# Allegro board WEEK 11 ECG PROJECT.brd
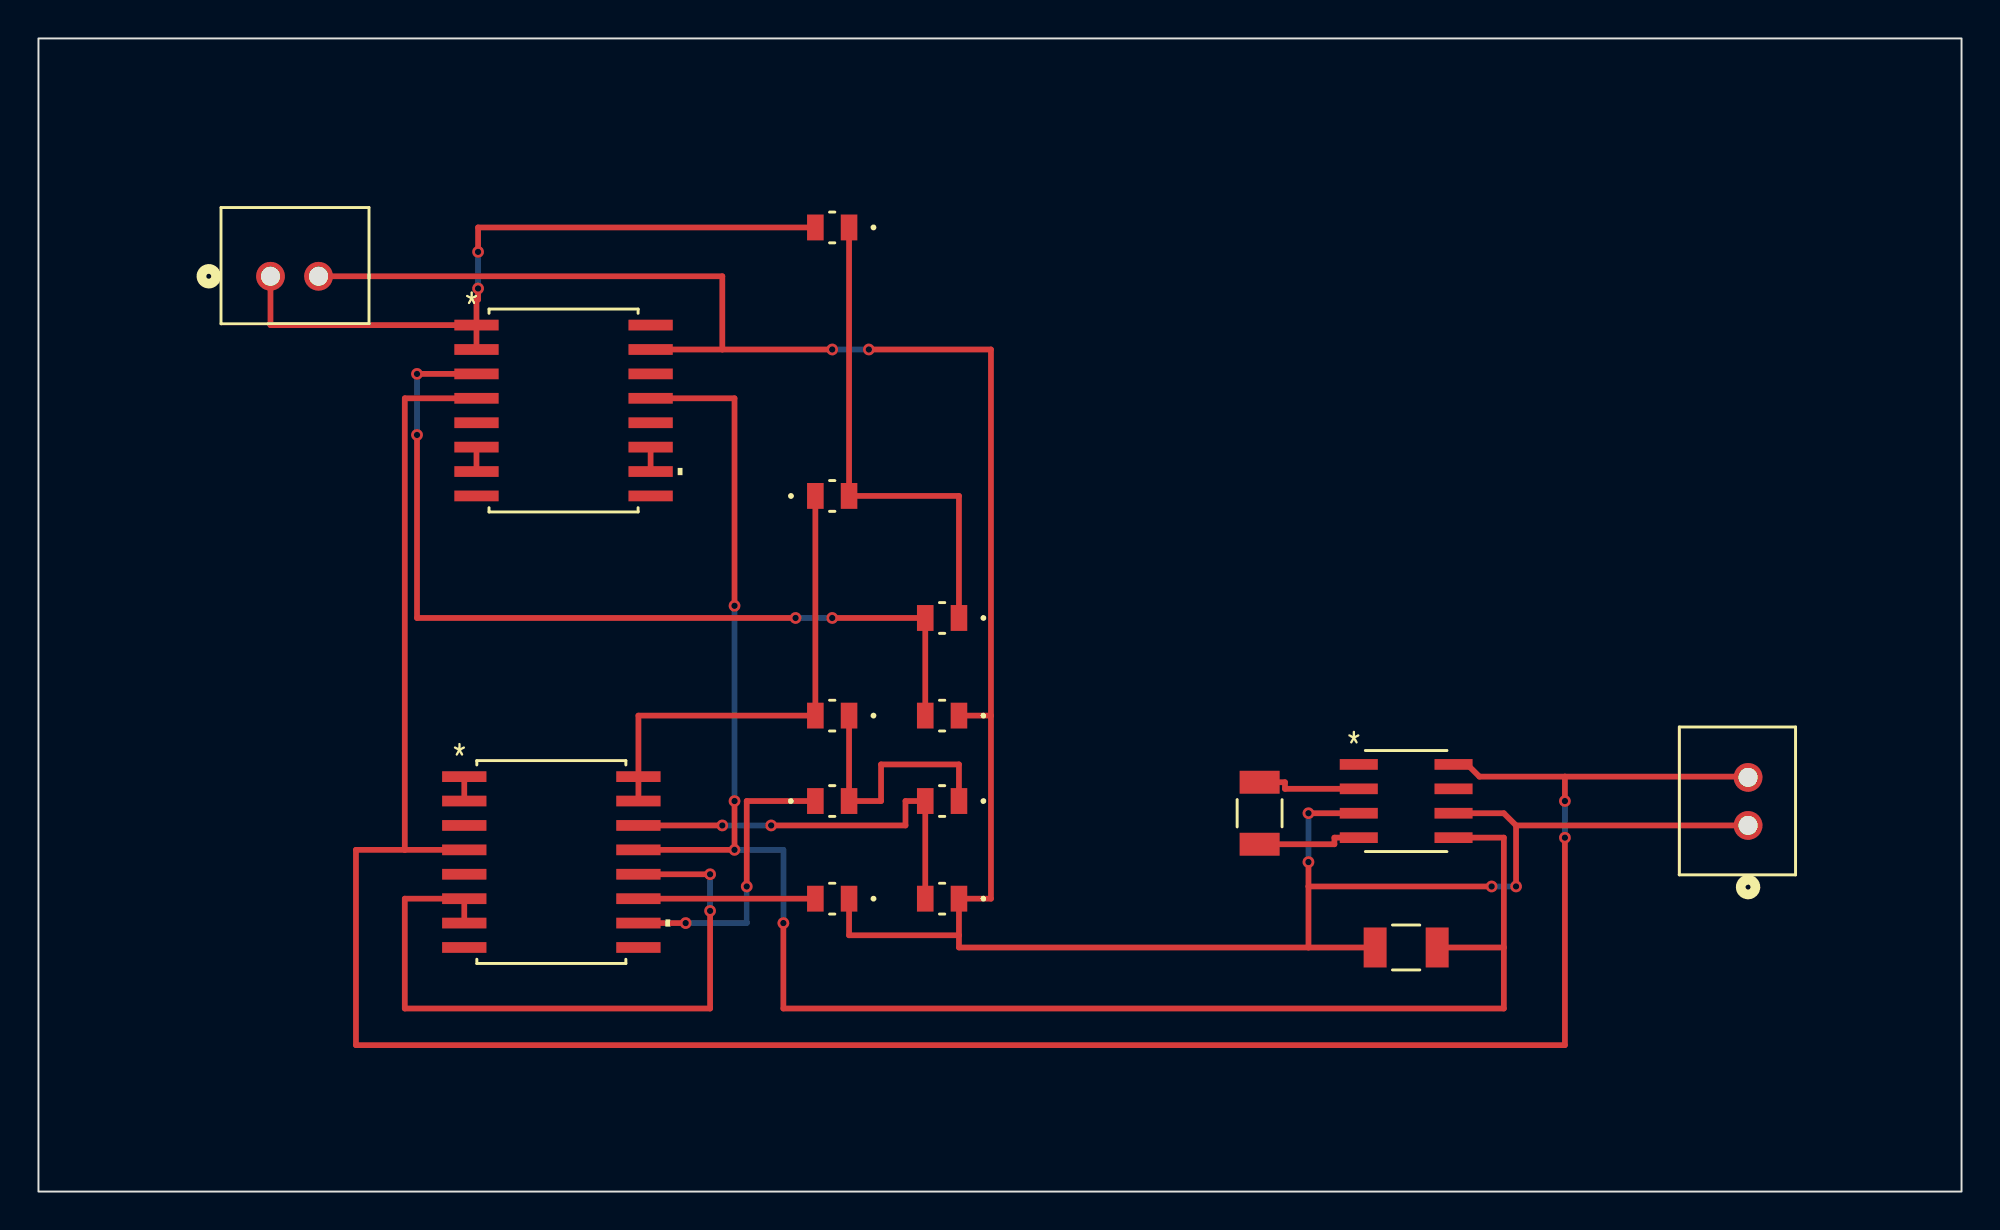
[diagram p0: board, top side]
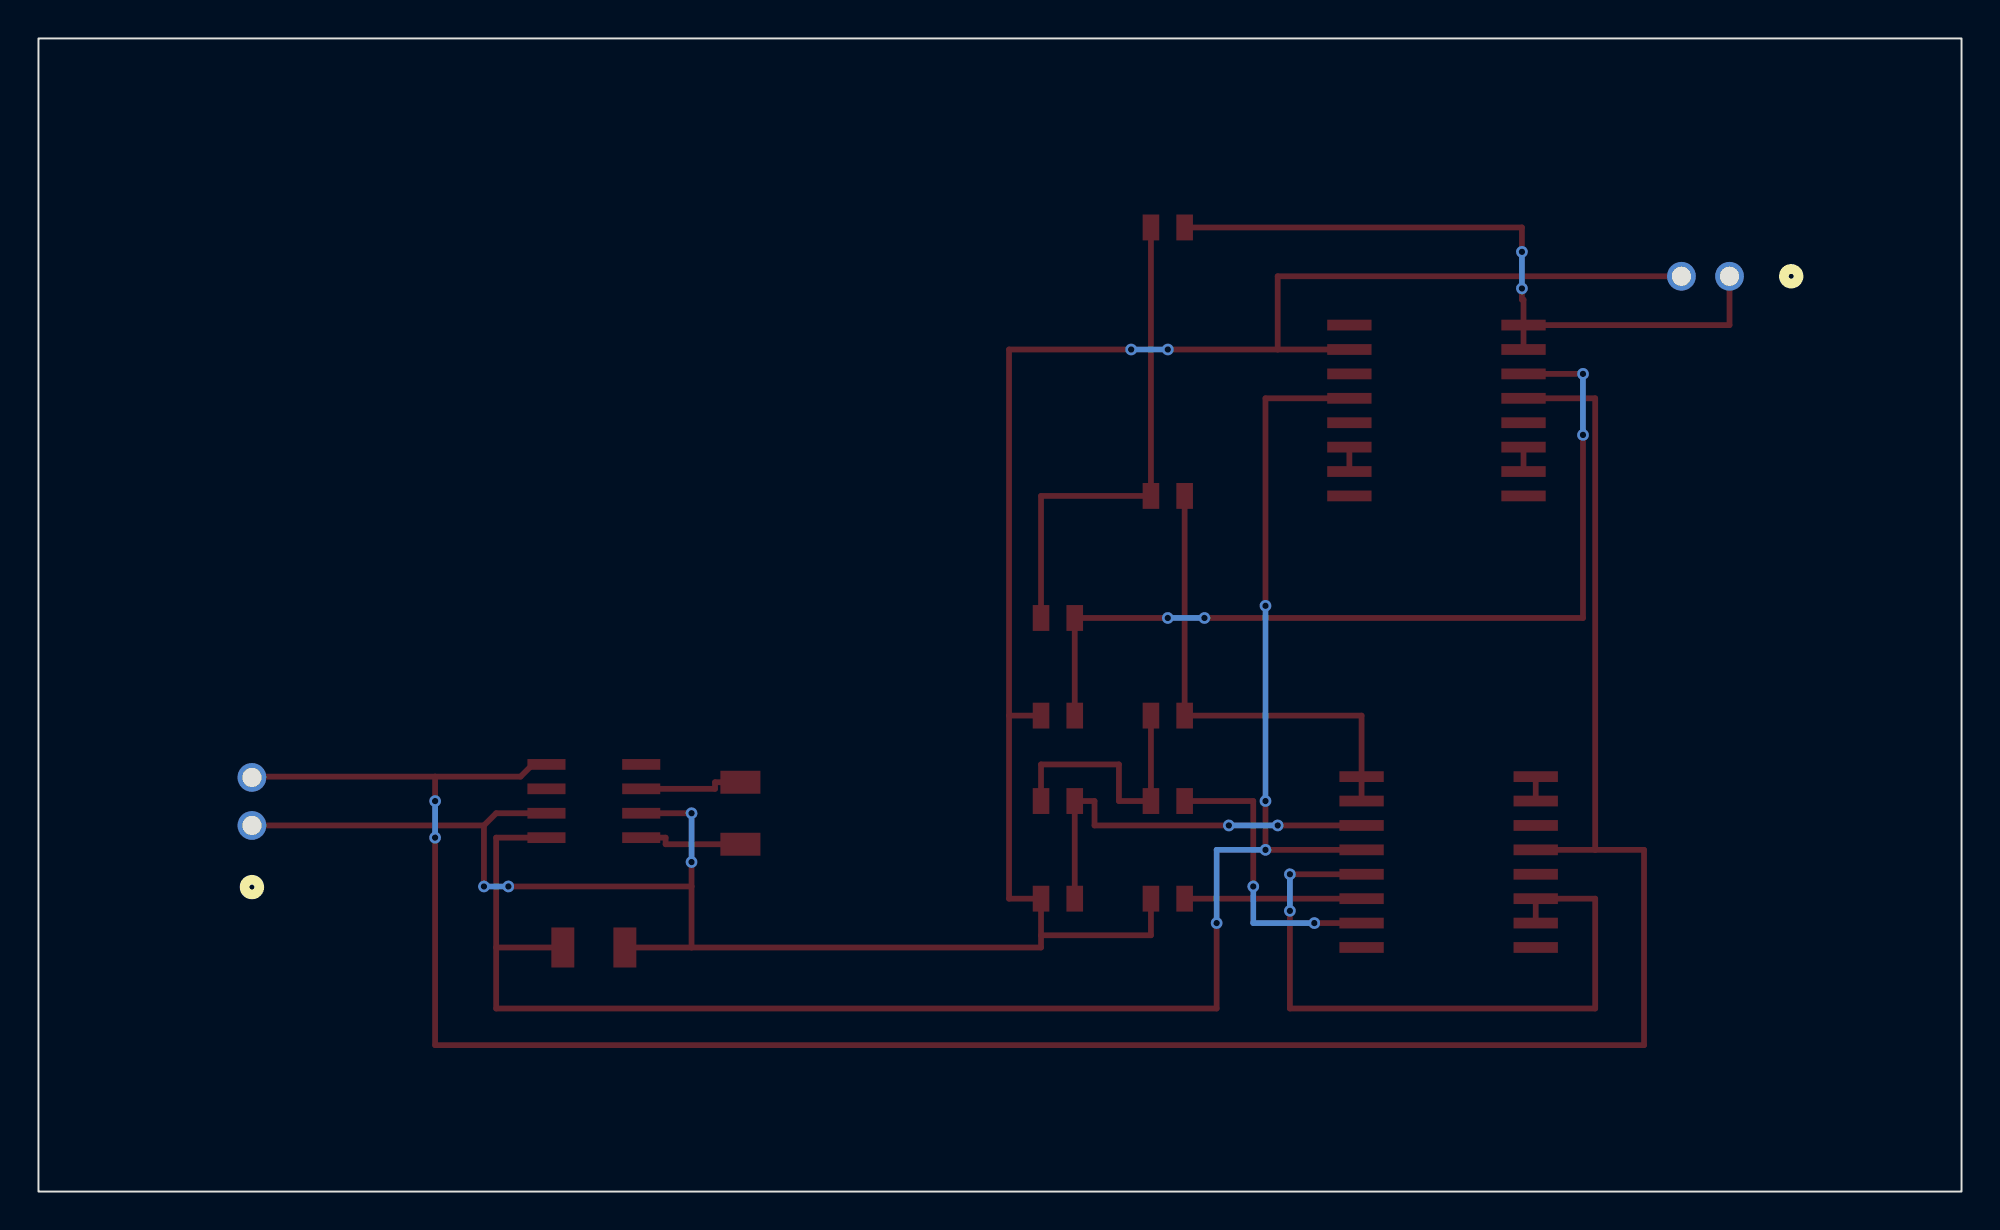
[diagram p1: board, bottom side, seen from below]

Outline 100 x 60 mm; copper layers: TOP, BOTTOM. Coordinates in mm from the lower left corner of the outline.
Outline path: rectangle 0,0 100,60

## Placement (name value [footprint] x y rotation side)
C7  47n  [0805]  41.27 24.77 180 top
C8  150n  [0805]  41.27 50.16 180 top
C9  15n  [0805]  46.99 15.24 180 top
C10  6.8n  [0805]  46.99 24.77 180 top
C13  47u  [CAP_595D_A]  63.5 19.68 270 top
C14  15u  [CAP_595D_A]  71.12 12.7 0 top
J2  CON2  [CONN_B2B-XH-A_LF__SN_]  12.06 47.62 0 top
J4  CON2  [CONN_B2B-XH-A_LF__SN_]  88.9 19.05 90 top
R8  1k  [0805]  41.27 15.24 180 top
R9  68k  [0805]  41.27 20.32 0 top
R10  560k  [0805]  46.99 20.32 180 top
R11  47k  [0805]  41.27 36.2 0 top
R12  560k  [0805]  46.99 29.84 180 top
U2  OP497/SO  [RW_16]  26.67 17.14 0 top
U3  OP497/SO  [RW_16]  27.3 40.64 0 top
U4  MAX660  [M08A]  71.12 20.32 0 top

## Library data of the parts
C7-C10 C13 C14 = C
J2 J4 = CON2
R8-R12 = R
U2 U3 = OP497/SO
U4 = MAX660_0

## Footprints (pads in the part's own frame, mm; a bottom-side part is the same pattern mirrored in y, then rotated)
0805
  rect 0.864x1.346 smd: 1(-0.876,0) 2(0.876,0)
CAP_595D_A
  rect 1.194x2.083 smd: 1(-1.613,0) 2(1.613,0)
CONN_B2B-XH-A_LF__SN_
  round 1.499 hole 0.991: 1(0,0) 2(2.5,0)
M08A
  rect 1.981x0.559 smd: 1(-2.464,1.905) 2(-2.464,0.635) 3(-2.464,-0.635) 4(-2.464,-1.905) 5(2.464,-1.905) 6(2.464,-0.635) 7(2.464,0.635) 8(2.464,1.905)
RW_16
  rect 2.306x0.561 smd: 1(-4.528,4.445) 2(-4.528,3.175) 3(-4.528,1.905) 4(-4.528,0.635) 5(-4.528,-0.635) 6(-4.528,-1.905) 7(-4.528,-3.175) 8(-4.528,-4.445) 9(4.528,-4.445) 10(4.528,-3.175) 11(4.528,-1.905) 12(4.528,-0.635) 13(4.528,0.635) 14(4.528,1.905) 15(4.528,3.175) 16(4.528,4.445)

## Nets
+VCC: J4.2 U2.4(V+) U3.4(V+) U4.8(V+)
-VCC: C14.2 U2.13(V-) U3.13(V-) U4.5(OUT)
GND_FIELD SIGNAL: C9.1 C10.1 C14.1 J2.2 J4.1 R8.1 U3.15(-IN) U4.3(GND) U4.6(LV)
DRIVEN: U3.5(+IN)
N00706: U2.3(+IN)
N00754: U2.1(OUT) U2.2(-IN)
N01008: U2.5(+IN)
N01022: U2.6(-IN) U2.7(OUT) U2.12(+IN)
N02327: R8.2 U2.11(-IN)
N02368: R9.1 U2.10(OUT)
N02372: C7.1 R9.2 R10.1
N02376: C9.2 R10.2 U2.14(+IN)
N02380: C7.2 R11.1 U2.15(-IN) U2.16(OUT)
N02384: C8.1 R11.2 R12.1
N02388: C10.2 R12.2 U3.3(+IN)
N02392: C8.2 J2.1 U3.1(OUT) U3.2(-IN)
N05501: U3.6(-IN) U3.7(OUT)
N05509: U3.12(+IN)
N05545: U3.10(OUT) U3.11(-IN)
N05553: U3.14(+IN)
N05656: U3.16(OUT)
N06041: C13.1 U4.2(CAP+)
N06048: C13.2 U4.4(CAP-)

Pads without a net: U2 8 9; U3 8 9; U4 1 7

## Via types
v1: diameter 0.61, hole 0.33, TOP to BOTTOM, 24 vias

## Routing (per net, layer and track width the routed paths; a pad name or vN(x,y) marks a point on that pad's centre or on a via; arc(x,y) is an arc through that point)
+VCC: length 135.5
  TOP w0.3: 79.38,21.59 88.9,21.59 J4.2 ; 79.38,21.59 v1(79.38,20.32) ; 79.38,21.59 74.93,21.59 74.3,22.23 U4.8 ; 19.05,17.78 16.51,17.78 16.51,7.62 79.38,7.62 v1(79.38,18.41) ; 19.05,17.78 U2.4 ; 19.05,17.78 19.05,41.27 U3.4
  BOTTOM w0.3: v1(79.38,18.41) v1(79.38,20.32)
-VCC: length 96.1
  TOP w0.3: 76.2,12.7 76.2,9.53 38.73,9.53 v1(38.73,13.97) ; 76.2,12.7 76.2,18.41 U4.5 ; 76.2,12.7 C14.2 ; U2.13 v1(36.2,17.78) v1(36.2,20.32) ; v1(36.2,30.48) 36.2,41.27 U3.13
  BOTTOM w0.3: v1(38.73,13.97) 38.73,17.78 v1(36.2,17.78) ; v1(36.2,30.48) v1(36.2,20.32)
GND_FIELD SIGNAL: length 145.4
  TOP w0.3: 66.04,15.88 v1(66.04,17.14) ; 66.04,15.88 66.04,12.7 ; 66.04,15.88 v1(75.56,15.88) ; v1(66.04,19.68) U4.3 ; U3.15 35.56,43.81 ; 35.56,43.81 v1(41.27,43.81) ; 35.56,43.81 35.56,47.62 J2.2 ; C10.1 49.53,24.77 ; 49.53,24.77 49.53,15.24 C9.1 47.87,13.34 ; 49.53,24.77 49.53,43.81 v1(43.18,43.81) ; 66.04,12.7 47.87,12.7 47.87,13.34 ; 66.04,12.7 C14.1 ; U4.6 76.2,19.68 76.83,19.05 ; J4.1 76.83,19.05 ; 76.83,19.05 v1(76.83,15.88) ; 47.87,13.34 42.15,13.34 R8.1
  BOTTOM w0.3: v1(76.83,15.88) v1(75.56,15.88) ; v1(41.27,43.81) v1(43.18,43.81) ; v1(66.04,17.14) v1(66.04,19.68)
N00754: length 1.3
  TOP w0.3: U2.2 U2.1
N01022: length 36.7
  TOP w0.3: U2.7 U2.6 19.05,15.24 19.05,9.53 34.92,9.53 v1(34.92,14.61) ; v1(34.92,16.51) U2.12
  BOTTOM w0.3: v1(34.92,14.61) v1(34.92,16.51)
N02327: length 9.2
  TOP w0.3: U2.11 R8.2
N02368: length 15.6
  TOP w0.3: U2.10 v1(33.66,13.97) ; R9.1 36.83,20.32 v1(36.83,15.88)
  BOTTOM w0.3: v1(33.66,13.97) 36.83,13.97 v1(36.83,15.88)
N02372: length 14
  TOP w0.3: C7.1 R9.2 43.81,20.32 43.81,22.23 47.87,22.23 R10.1
N02376: length 21.3
  TOP w0.3: v1(35.56,19.05) U2.14 ; C9.2 R10.2 45.09,20.32 45.09,19.05 v1(38.1,19.05)
  BOTTOM w0.3: v1(38.1,19.05) v1(35.56,19.05)
N02380: length 25.1
  TOP w0.3: R11.1 C7.2 31.2,24.77 U2.16 U2.15
N02384: length 26
  TOP w0.3: R12.1 47.87,36.2 R11.2 C8.1
N02388: length 47.3
  TOP w0.3: C10.2 R12.2 v1(41.27,29.84) ; v1(19.68,39.37) 19.68,29.84 v1(39.37,29.84) ; v1(19.68,42.55) U3.3
  BOTTOM w0.3: v1(19.68,39.37) v1(19.68,42.55) ; v1(41.27,29.84) v1(39.37,29.84)
N02392: length 37.2
  TOP w0.3: v1(22.86,48.9) 22.86,50.16 C8.2 ; U3.2 U3.1 ; U3.1 12.06,45.09 J2.1 ; U3.1 22.78,46.41 22.86,46.41 v1(22.86,46.99)
  BOTTOM w0.3: v1(22.86,48.9) v1(22.86,46.99)
N05501: length 1.3
  TOP w0.3: U3.6 U3.7
N05545: length 1.3
  TOP w0.3: U3.10 U3.11
N06041: length 5.5
  TOP w0.3: U4.2 64.82,20.95 64.82,21.3 C13.1
N06048: length 5.5
  TOP w0.3: U4.4 67.39,18.41 67.39,18.07 C13.2
